# Altium PCB UV_Watch_1.PcbDoc (part 1 of 2)
Units mil, origin at the board's own origin, x right, y up, seen from the top; angles counter-clockwise.
Board outline 1500 x 1500 mil, 2 copper layers (Top Layer, Bottom Layer), stack 12.8 mil thick; 84 components, 41 nets, 258 pads, 64 vias.
Unrouted connection lines stored in the file: 1.
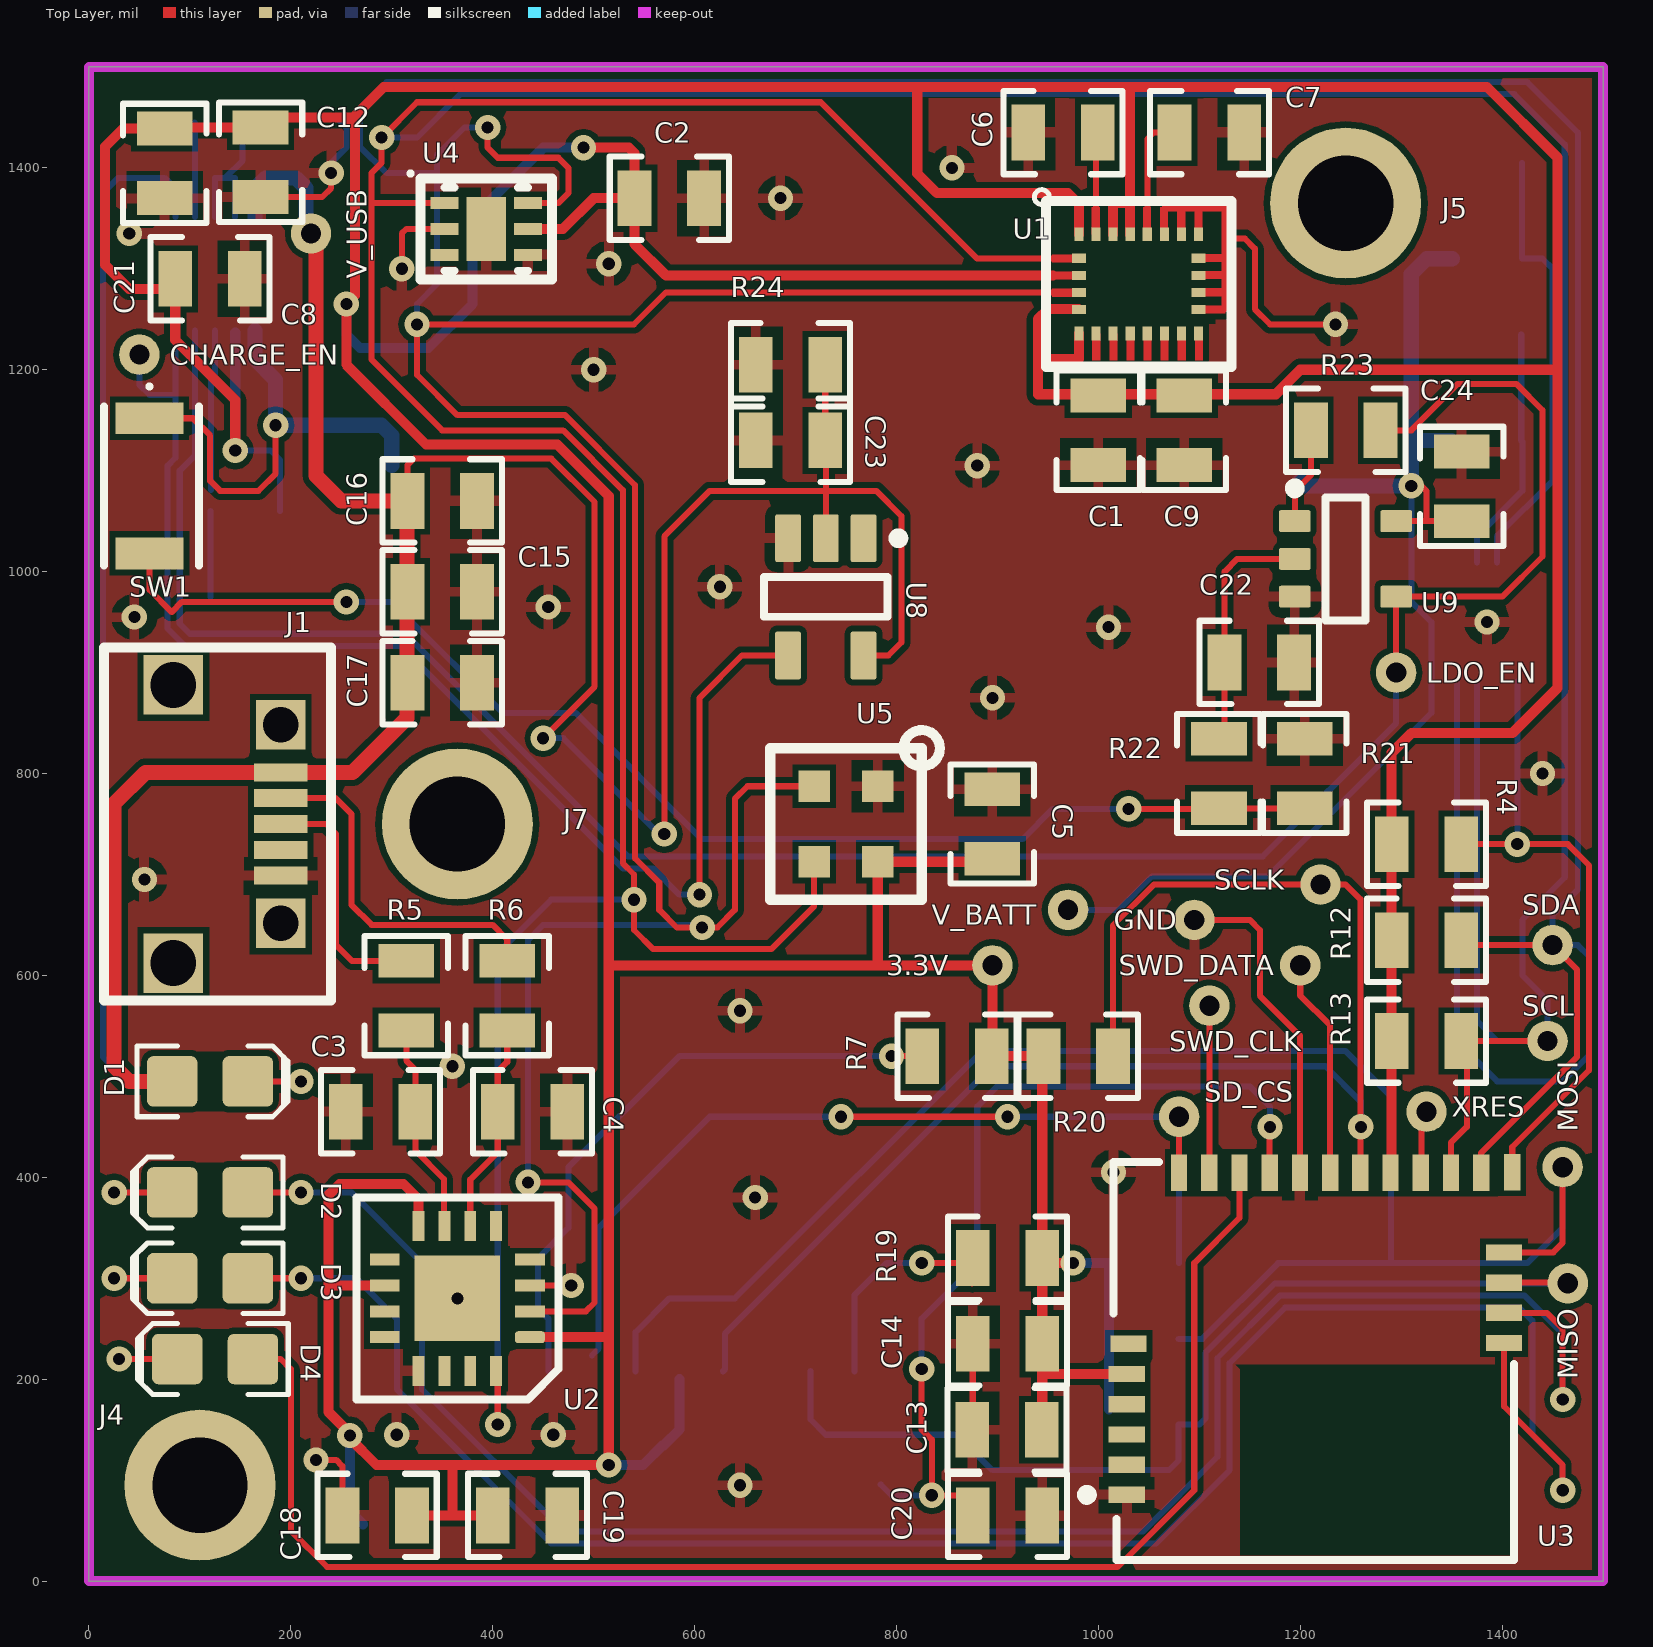
[diagram p0: Top Layer view]
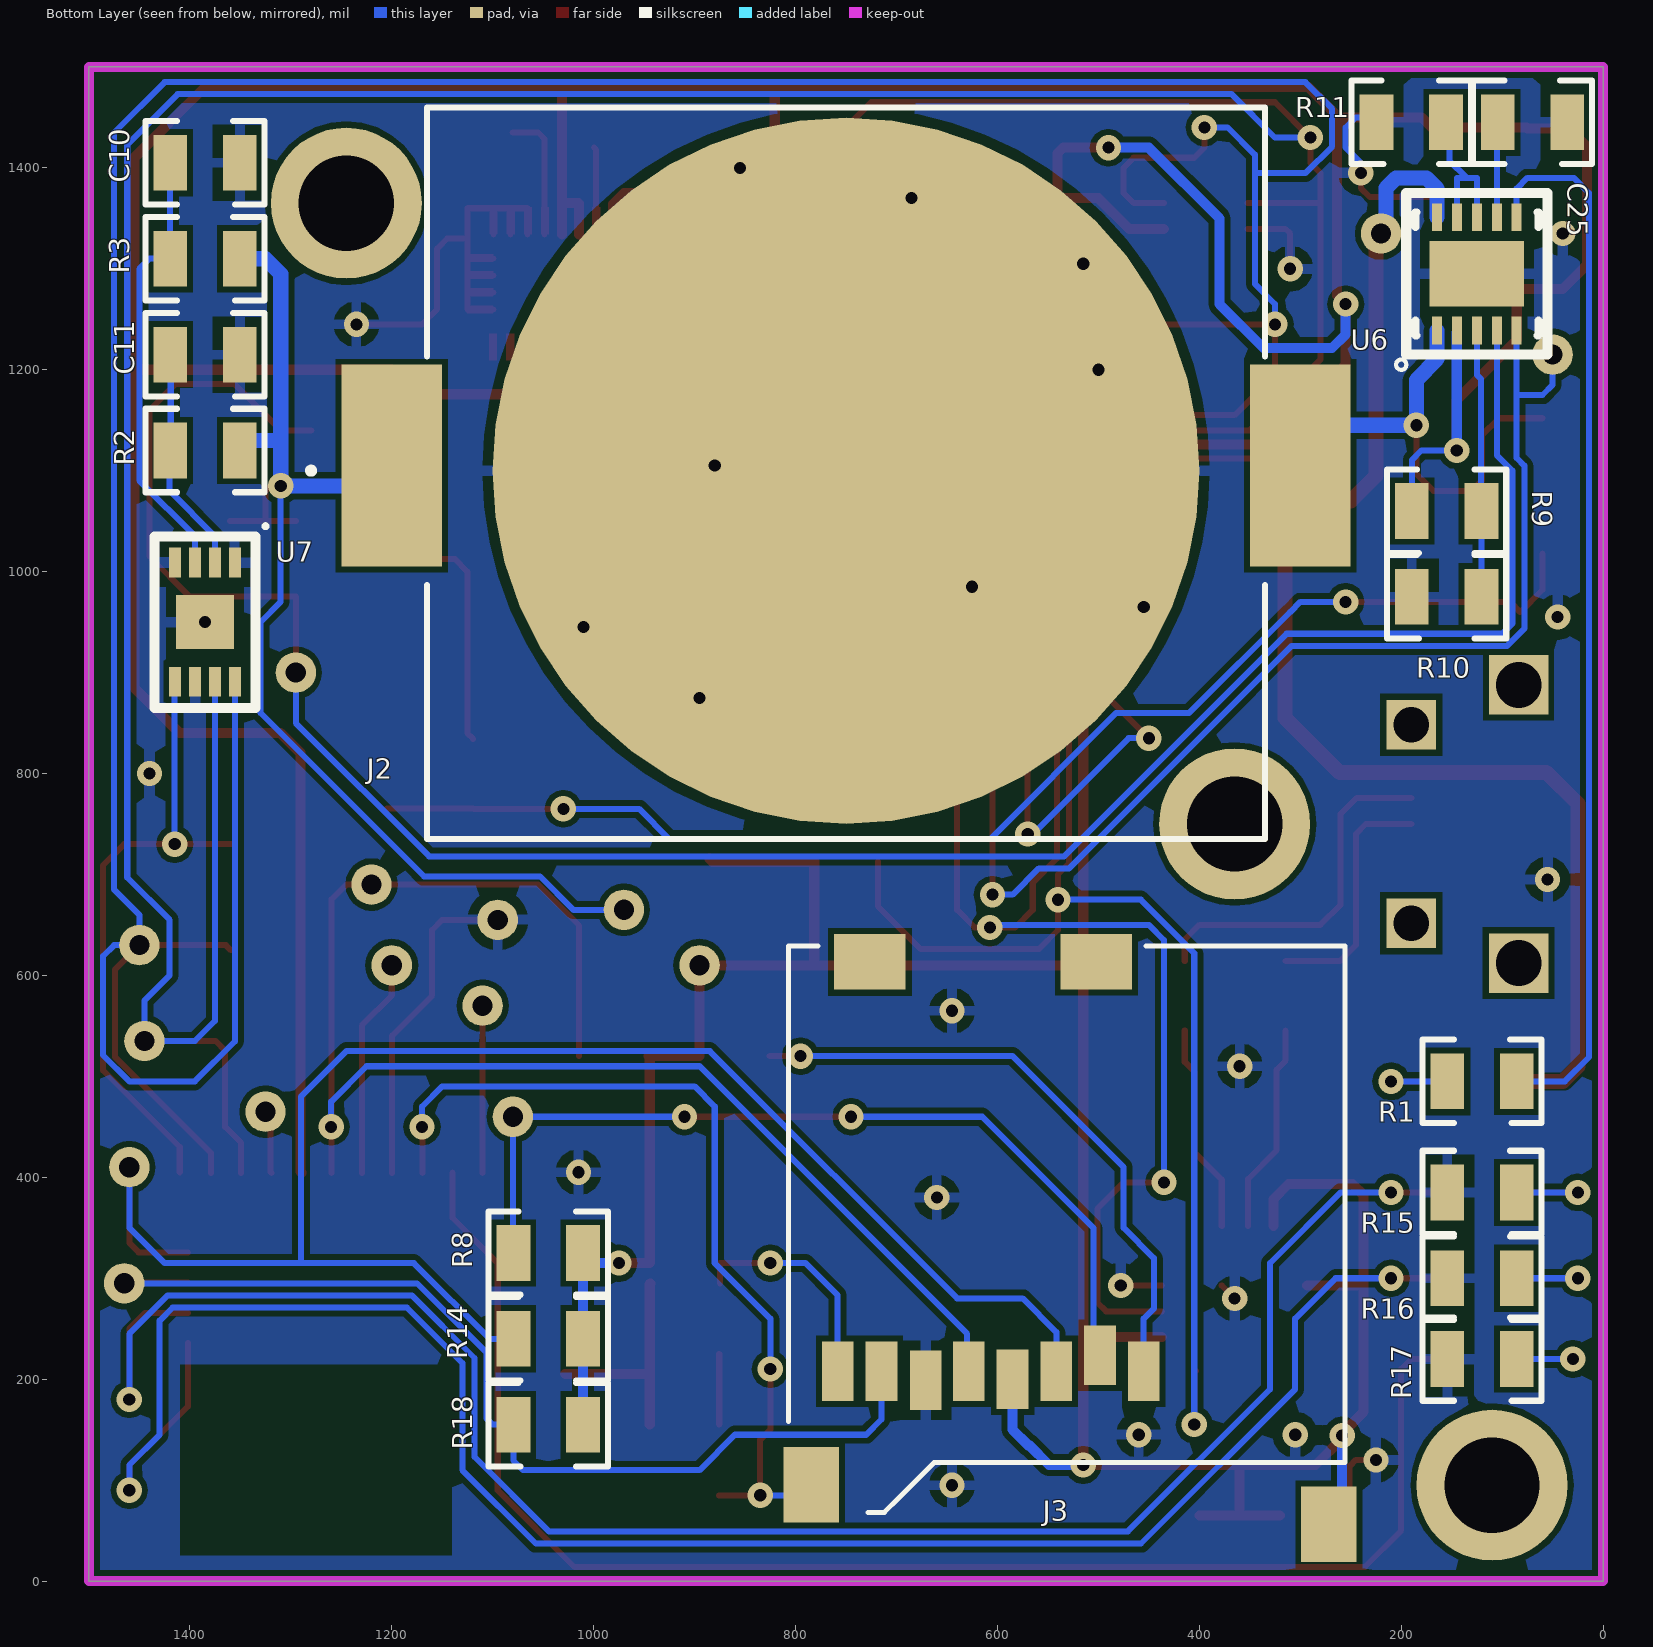
[diagram p1: Bottom Layer view, seen from below]
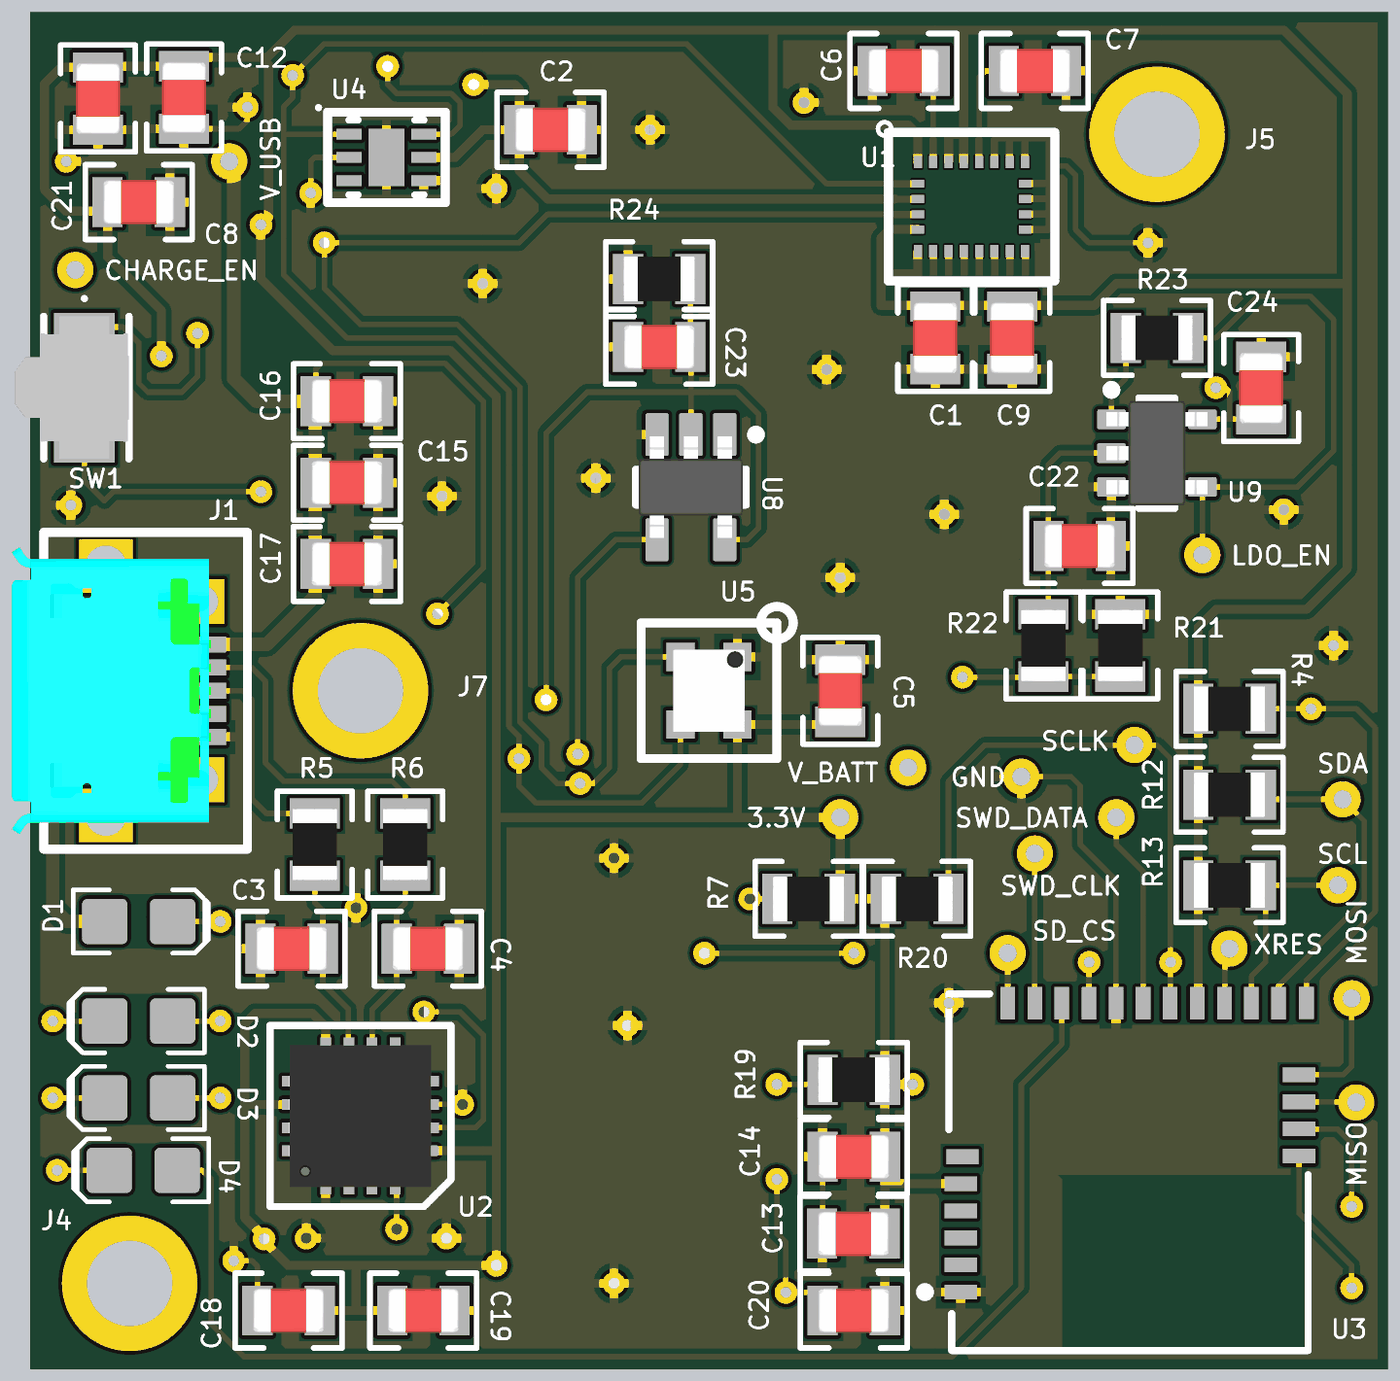
[diagram p2: 3D render of the assembled board from above, using the file's embedded part models]
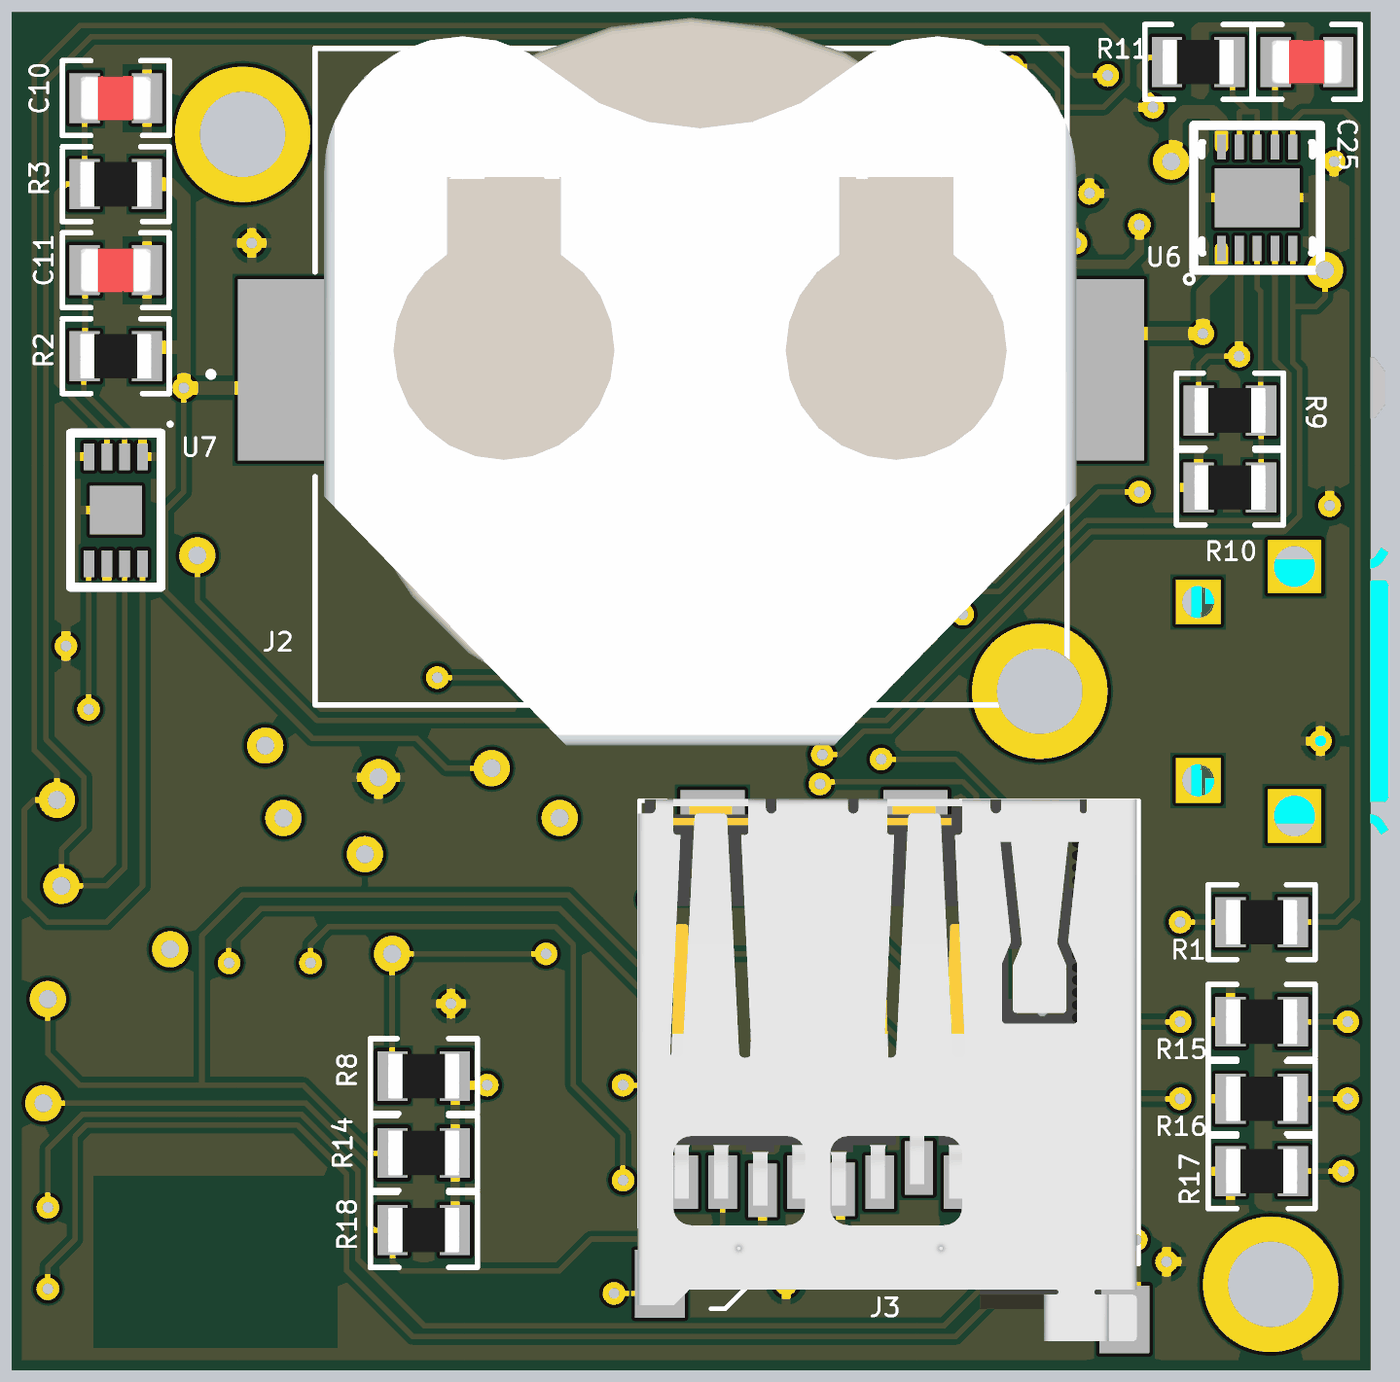
[diagram p3: 3D render of the assembled board from below, using the file's embedded part models]

## Layer stack, top to bottom
Top Solder: solder mask 0.4, Solder Resist, Dk 3.5
Top Layer: signal copper 1.4
Dielectric 1: core 10, FR-4, Dk 4.2
Bottom Layer: signal copper 1.4
Bottom Solder: solder mask 0.4, Solder Resist, Dk 3.5

## Board outline
0,0 1500,0 1500,1500 0,1500

## Design rules (kind name [scope] priority, off if disabled: settings)
Clearance [All] p1: gap=6 ignorepadtopadclearanceinfootprint=FALSE
MinimumSolderMaskSliver [All] p1: minsoldermaskwidth=6
PolygonConnect [All] p1: connectstyle=Relief reliefconductorwidth=10 reliefentries=4 polygonreliefangle="90 Angle" airgapwidth=10
RoutingVias [All] p1: holewidth=14 width=25 viastyle="Through Hole" minholewidth=12 minwidth=15 maxholewidth=28 maxwidth=50
SilkToSilkClearance [All] p1: silktosilkclearance=6
SilkToSolderMaskClearance [IsPad] p1: minsilkscreentomaskgap=6 clearancetoexposedcopper=TRUE
SolderMaskExpansion [All] p1: expansion=4
Width [All] p1: maxlimit=50 minlimit=6 preferedwidth=6
27 further rules are at their usual default settings.

## Components (designator, comment, footprint, x,y, rotation, side; value= is the part's Value field where it differs from the comment)
3.3V "Pogo-Pin Pad" Pogo-Pin-Hole 895,610 r90 top
C1 "10uF" CAP-0805(2012)-R 1000,1140 r270 top
C2 "1uF" CAP-0805(2012)-R 575,1370 r0 top
C3 "47pF" CAP-0805(2012)-R 288.9,465 r0 top
C4 "47pF" CAP-0805(2012)-R 439.45,465 r180 top
C5 "1uF" CAP-0805(2012)-R 895,750 r270 top
C6 "100nF" CAP-0805(2012)-R 965,1435 r180 top
C7 "10nF" CAP-0805(2012)-R 1110,1435 r0 top
C8 "1uF" CAP-0805(2012)-R 120,1290 r0 top
C9 "100nF" CAP-0805(2012)-R 1085,1140 r270 top
C10 "10nF" CAP-0805(2012)-R 1385,1405 r180 bottom
C11 "1uF" CAP-0805(2012)-R 1385,1215 r180 bottom
C12 "10uF" CAP-0805(2012)-R 170,1405.55 r270 top
C13 "10uF" CAP-0805(2012)-R 909.45,150 r180 top
C14 "100nF" CAP-0805(2012)-R 910,235 r180 top
C15 "1uF" CAP-0805(2012)-R 350,980 r0 top
C16 "10uF" CAP-0805(2012)-R 350,1070 r180 top
C17 "10uF" CAP-0805(2012)-R 350,890 r180 top
C18 "10uF" CAP-0805(2012)-R 285.55,65 r180 top
C19 "1uF" CAP-0805(2012)-R 434.45,65 r180 top
C20 "1uF" CAP-0805(2012)-R 910,65 r0 top
C21 "100nF" CAP-0805(2012)-R 75,1404.45 r90 top
C22 "100nF" CAP-0805(2012)-R 1159.45,910 r180 top
C23 "1uF" CAP-0805(2012)-R 695,1130 r0 top
C24 "1uF" CAP-0805(2012)-R 1360,1084.45 r90 top
C25 "68nF" CAP-0805(2012)-R 70,1445 r180 bottom
CHARGE_EN "Pogo-Pin Pad" Pogo-Pin-Hole 50,1215 r180 top
D1 "Green" LED-0805-A 120,495 r0 top
D2 "Orange" LED-0805-A 120,385 r180 top
D3 "Red" LED-0805-A 120,300 r180 top
D4 "Blue" LED-0805-A 125,220 r180 top
GND "Pogo-Pin Pad" Pogo-Pin-Hole 1095,655 r180 top
J1 "USB" USB_Connector_5P_MICRO_USB_FCI 190,750 r270 top
J2 "Header 2 pin" LINX_BATT_HLDR 750,1100 r180 bottom
J3 "693071010811" 693071010811 807.05,629.13 r0 bottom
J4 "M2/2-56 Mounting Hole" "MOUNTING HOLE" 110,95 r0 top
J5 "M2/2-56 Mounting Hole" "MOUNTING HOLE" 1245,1365 r0 top
J7 "M2/2-56 Mounting Hole" "Mounting Hole" 365,750 r0 top
LDO_EN "Pogo-Pin Pad" Pogo-Pin-Hole 1295,900 r180 top
MISO "Pogo-Pin Pad" Pogo-Pin-Hole 1465,295 r90 top
MOSI "Pogo-Pin Pad" Pogo-Pin-Hole 1460,410 r90 top
R1 "71.5R" R-0805(2012)-R 120,495 r180 bottom
R2 "1kR" R-0805(2012)-R 1385,1120 r180 bottom
R3 "150R" R-0805(2012)-R 1385,1310 r180 bottom
R4 "4.7kR" R-0805(2012)-R 1325,730 r0 top
R5 "27R" R-0805(2012)-R 314.45,580 r270 top
R6 "27R" R-0805(2012)-R 414.45,580 r270 top
R7 "100kR" R-0805(2012)-R 860,520 r180 top
R8 "4.7kR" R-0805(2012)-R 1045,325 r0 bottom
R9 "442kR" R-0805(2012)-R 155,1060 r0 bottom
R10 "160kR" R-0805(2012)-R 155,975 r0 bottom
R11 "25.5kR" R-0805(2012)-R 190,1445 r0 bottom
R12 "4.7kR" R-0805(2012)-R 1325,635 r180 top
R13 "4.7kR" R-0805(2012)-R 1325,535 r0 top
R14 "4.7kR" R-0805(2012)-R 1045,240 r0 bottom
R15 "80.6R" R-0805(2012)-R 120,385 r180 bottom
R16 "80.6R" R-0805(2012)-R 120,300 r180 bottom
R17 "100R" R-0805(2012)-R 120,220 r180 bottom
R18 "4.7kR" R-0805(2012)-R 1045,155 r0 bottom
R19 "100kR" R-0805(2012)-R 910,320 r180 top
R20 "4.7kR" R-0805(2012)-R 980,520 r0 top
R21 "100kR" R-0805(2012)-R 1204.45,800 r90 top
R22 "10kR" R-0805(2012)-R 1119.45,800 r90 top
R23 "10kR" R-0805(2012)-R 1245,1140 r0 top
R24 "100kR" R-0805(2012)-R 695,1205 r180 top
SCL "Pogo-Pin Pad" Pogo-Pin-Hole 1445,535 r90 top
SCLK "Pogo-Pin Pad" Pogo-Pin-Hole 1220,690 r90 top
SD_CS "Pogo-Pin Pad" Pogo-Pin-Hole 1080,460 r90 top
SDA "Pogo-Pin Pad" Pogo-Pin-Hole 1450,630 r90 top
SW1 "SW-SPST-2_C" OMRON-B3U-3000P_V 60,1085 r270 top
SWD_CLK "Pogo-Pin Pad" Pogo-Pin-Hole 1110,570 r180 top
SWD_DATA "Pogo-Pin Pad" Pogo-Pin-Hole 1200,610 r90 top
U1 "LSM9DS1" STM-LGA-24 1040,1285 r0 top
U2 "FT201XQ-R" QFN-16 365,280 r180 top
U3 "CYBLE-222014-01" CYP-SP21_V 1215,245 r180 top
U4 "TMP116" WSON-6 393.66,1339.41 r0 top
U5 "GUVB-C31SM" GUVB-C31SM 750,750 r0 top
U6 "LTC4063" LT-DD-10_V 125,1295 r90 bottom
U7 "MAX17043G" TDFN-MN8 1385,950 r270 bottom
U8 "TI-SN74XXX1XX4-XX-5" DBV0005A_M 730,975 r270 top
U9 "TI-SN74XXX1G80-5" DBV0005A_L 1244.8,1012.6 r0 top
V_BATT "Pogo-Pin Pad" Pogo-Pin-Hole 970,665 r180 top
V_USB "Pogo-Pin Pad" Pogo-Pin-Hole 220,1335 r90 top
XRES "Pogo-Pin Pad" Pogo-Pin-Hole 1325,465 r90 top

## Footprints (in the part's own frame and the unit in brackets; to place one, negate y for a bottom-side part, rotate by r counter-clockwise, add the part's x,y. Pads: shape width x height; smd on the part's side, far side on the other; paste and mask are expansions set on the pad)
693071010811 [mm] "Wurth CONN MICRO SD CARD PUSH-PUSH R/A"
  rect 0.8x1.5 smd: 1(-8.94,10.7) 2(-7.84,10.3) 3(-6.74,10.7) 4(-5.64,10.9) 5(-4.54,10.7) 6(-3.454,10.929) 7(-2.34,10.7) 8(-1.24,10.7)
  rect 1.4x1.9 smd: 9(-0.575,13.55) 10(-13.6,14.55)
  rect 1.8x1.4 smd: 11(-2.05,0.4) 12(-7.75,0.4)
  silkscreen extent -14,0 0,14.25, body extent -13.95,-0.04 0.05,15.16, height 1.84
CAP-0805(2012)-R [mm] "Capacitor 0805(2012) Reflow"
  rect 0.85x1.4 smd: 1(-0.875,0) 2(0.875,0)
  silkscreen extent -1.5,-1.05 1.5,1.05, body extent -1,-0.63 1,0.63, height 0.78
CYP-SP21_V [mm] "Module, 2-Leads, Body 10x10mm"
  rect 0.91x0.41 smd: 1(4.745,4.053) 2(4.745,3.293) 3(4.745,2.533) 4(4.745,1.773) 5(4.745,1.013) 6(4.699,0.254) 19(-4.745,-2.047) 20(-4.745,-1.288) 21(-4.745,-0.527) 22(-4.745,0.235)
  rect 0.41x0.91 smd: 7(3.43,-4.052) 8(2.67,-4.052) 9(1.91,-4.052) 10(1.15,-4.052) 11(0.39,-4.052) 12(-0.37,-4.052) 13(-1.13,-4.052) 14(-1.89,-4.052) 15(-2.65,-4.052) 16(-3.41,-4.052) 17(-4.17,-4.052) 18(-4.953,-4.064)
  Top Layer pour cut-out: -4.953,5.588 -4.953,0.762 2.032,0.762 1.905,0.889 1.905,5.588
  Bottom Layer pour cut-out: -4.953,5.588 -4.953,0.762 1.905,0.762 1.905,5.588
  silkscreen extent -5,-4.32 5.87,5.69, body extent -5,-4.31 5,5.69, height 1.8
DBV0005A_L [mm] "SOT23, 5-Leads, Body 3.05x1.75mm, Pitch 0.95mm, IPC High Density"
  rrect18% 0.8x0.55 smd: 1(-1.275,0.95) 2(-1.275,0) 3(-1.275,-0.95) 4(1.275,-0.95) 5(1.275,0.95)
  silkscreen extent -1.4,-1.55 0.5,1.9, body extent -1.42,-1.46 1.42,1.46, height 1.08
DBV0005A_M [mm] "SOT23, 5-Leads, Body 3.05x1.75mm, Pitch 0.95mm, IPC Low Density"
  rrect15% 1.2x0.65 smd: 1(-1.475,0.95) 2(-1.475,0) 3(-1.475,-0.95) 4(1.475,-0.95) 5(1.475,0.95)
  silkscreen extent -1.6,-1.55 0.5,1.95, body extent -1.42,-1.46 1.42,1.46, height 1.08
GUVB-C31SM [mm]
  rect 0.8x0.8 smd: 1(0.8,0.95) 2(-0.8,0.95) 3(-0.8,-0.95) 4(0.8,-0.95)
  silkscreen extent -1.91,-1.91 2.36,2.36, body extent -1,-1.15 1,1.15, height 1.4
LED-0805-A [mil]
  round 20 on Mech14: 0(0,0)
  rrect25% 50x50 smd: A(-37.5,0) K(37.5,0)
  Top Layer pour cut-out: -15,30 15,30 15,-30 -15,-30
  silkscreen extent -72,-35 77,35, body extent -39,-25 39,25, height 31
LINX_BATT_HLDR [mil]
  rect 100x200 smd: 1(-450,5) 1(450,5)
  round 700 smd: 2(0,0)
  silkscreen extent -533,-365 415,360, body extent -405,-410 425,394, height 150
LT-DD-10_V [mm] "SON, 10-Leads, Body 3x3mm, Pitch 0.5mm, Thermal Pad 2.38x1.65mm"
  rect 0.7x0.25 smd mask+0.102: 1(-1.425,1) 2(-1.425,0.5) 3(-1.425,0) 4(-1.425,-0.5) 5(-1.425,-1) 6(1.425,-1) 7(1.425,-0.5) 8(1.425,0) 9(1.425,0.5) 10(1.425,1)
  rect 1.65x2.38 smd mask+0.102: 11(0,0)
  silkscreen extent -2.42,-1.78 2.03,2.04, body extent -1.5,-1.5 1.5,1.5, height 0.8
"MOUNTING HOLE" [mm] "M2 or 2-56 Mounting Hole"
  round 3.8 hole 2.4: 11(0,0)
"Mounting Hole" [mm] "M2 or 2-56 Mounting Hole"
  round 3.8 hole 2.4: 11(0,0)
OMRON-B3U-3000P_V [mm] "SMD, 2-Leads, Body 4x3.2mm"
  rect 0.8x1.7 smd: 1(-1.7,0) 2(1.7,0)
  silkscreen extent -2.55,-1.14 2,1.25, body extent -2,-1.95 2,1.25, height 1.2
Pogo-Pin-Hole [mil]
  round 40 hole 20: 1(0,0)
QFN-16 [mm]
  rrect50% 0.75x0.3 smd: 1(-1.825,0.975)
  rect 0.75x0.3 smd: 2(-1.825,0.325) 3(-1.825,-0.325) 4(-1.825,-0.975) 9(1.825,-0.975) 10(1.825,-0.325) 11(1.825,0.325) 12(1.825,0.975)
  rect 0.3x0.75 smd: 5(-0.975,-1.825) 6(-0.325,-1.825) 7(0.325,-1.825) 8(0.975,-1.825) 13(0.975,1.825) 14(0.325,1.825) 15(-0.325,1.825) 16(-0.975,1.825)
  rect 2.15x2.15 smd: 17(0,0)
  silkscreen extent -2.54,-2.54 2.54,2.54, body extent -2,-2 2,2, height 0.92
R-0805(2012)-R [mm] "Resistor 0805(2012) Reflow"
  rect 0.85x1.4 smd: 1(-0.875,0) 2(0.875,0)
  silkscreen extent -1.5,-1.05 1.5,1.05, body extent -1,-0.62 1,0.63, height 0.5
STM-LGA-24 [mm] "LGA, 24-Leads, Body 3.65x3.15mm, Pitch 0.43mm"
  rect 0.23x0.35 smd mask+0.05: 1(-1.505,1.25) 6(-1.505,-1.25) 7(-1.075,-1.25) 8(-0.645,-1.25) 9(-0.215,-1.25) 10(0.215,-1.25) 11(0.645,-1.25) 12(1.075,-1.25) 13(1.505,-1.25) 18(1.505,1.25) 19(1.075,1.25) 20(0.645,1.25) 21(0.215,1.25) 22(-0.215,1.25) 23(-0.645,1.25) 24(-1.075,1.25)
  rect 0.35x0.23 smd mask+0.05: 2(-1.505,0.645) 3(-1.505,0.215) 4(-1.505,-0.215) 5(-1.505,-0.645) 14(1.505,-0.645) 15(1.505,-0.215) 16(1.505,0.215) 17(1.505,0.645)
  Top Layer region: -2.185,-0.55 -2.185,-0.753 -1.505,-0.753 -1.505,-0.55
  Top Layer region: -2.185,-0.12 -2.185,-0.323 -1.505,-0.323 -1.505,-0.12
  Top Layer region: -2.185,0.31 -2.185,0.107 -1.505,0.107 -1.505,0.31
  Top Layer region: -2.185,0.74 -2.185,0.537 -1.505,0.537 -1.505,0.74
  Top Layer region: -1.41,1.93 -1.613,1.93 -1.613,1.25 -1.41,1.25
  Top Layer region: -0.98,1.93 -1.183,1.93 -1.183,1.25 -0.98,1.25
  Top Layer region: -0.55,1.93 -0.753,1.93 -0.753,1.25 -0.55,1.25
  Top Layer region: -0.12,1.93 -0.323,1.93 -0.323,1.25 -0.12,1.25
  Top Layer region: 0.31,1.93 0.107,1.93 0.107,1.25 0.31,1.25
  Top Layer region: 0.74,1.93 0.537,1.93 0.537,1.25 0.74,1.25
  Top Layer region: 1.17,1.93 0.967,1.93 0.967,1.25 1.17,1.25
  Top Layer region: 1.6,1.93 1.397,1.93 1.397,1.25 1.6,1.25
  Top Layer region: 2.185,0.55 2.185,0.753 1.505,0.753 1.505,0.55
  Top Layer region: 2.185,0.12 2.185,0.323 1.505,0.323 1.505,0.12
  Top Layer region: 2.185,-0.31 2.185,-0.107 1.505,-0.107 1.505,-0.31
  Top Layer region: 2.185,-0.74 2.185,-0.537 1.505,-0.537 1.505,-0.74
  Top Layer region: 1.41,-1.93 1.613,-1.93 1.613,-1.25 1.41,-1.25
  Top Layer region: 0.98,-1.93 1.183,-1.93 1.183,-1.25 0.98,-1.25
  Top Layer region: 0.55,-1.93 0.753,-1.93 0.753,-1.25 0.55,-1.25
  Top Layer region: 0.12,-1.93 0.323,-1.93 0.323,-1.25 0.12,-1.25
  Top Layer region: -0.31,-1.93 -0.107,-1.93 -0.107,-1.25 -0.31,-1.25
  Top Layer region: -0.74,-1.93 -0.537,-1.93 -0.537,-1.25 -0.74,-1.25
  Top Layer region: -1.6,-1.93 -1.397,-1.93 -1.397,-1.25 -1.6,-1.25
  Top Layer region: -1.17,-1.93 -0.967,-1.93 -0.967,-1.25 -1.17,-1.25
  Top Layer pour cut-out: -1.016,0.762 1.016,0.762 1.016,-0.762 -1.016,-0.762
  silkscreen extent -2.62,-2.08 2.34,2.37, body extent -1.82,-1.57 1.83,1.58, height 1.03
TDFN-MN8 [mm] "SON, 8-Leads, Body 2x3mm, Pitch 0.5mm, Microchip Recommended"
  rect 0.75x0.3 smd: 1(-1.5,0.75) 2(-1.5,0.25) 3(-1.5,-0.25) 4(-1.5,-0.75) 5(1.5,-0.75) 6(1.5,-0.25) 7(1.5,0.25) 8(1.5,0.75)
  rect 1.36x1.46 smd: 9(0,0)
  silkscreen extent -2.46,-1.27 2.16,1.57, body extent -1.52,-1.02 1.52,1.02, height 0.8
USB_Connector_5P_MICRO_USB_FCI [mm] "USB_Connector_5P_MICRO_USB_FCI_TypeB"
  rect 0.45x1.35 smd: 1(-1.3,0) 2(-0.65,0) 3(0,0) 4(0.65,0) 5(1.3,0)
  rect 1.25x1.25 hole 0.9: 15(2.5,0) 16(-2.5,0)
  rect 1.5x1.5 hole 1.15: 18(-3.5,-2.7) 18(3.5,-2.7)
  silkscreen extent -4.44,-4.45 4.45,1.27, body extent -4.02,-5.33 4.02,0.25, height 2.73
WSON-6 [mm] "SON, 6-Leads, Body 2x2mm, Pitch 0.65mm, Thermal Pad 1X1.6mm"
  rect 0.7x0.3 smd: 1(-1.05,0.65) 2(-1.05,0) 3(-1.05,-0.65) 4(1.05,-0.65) 5(1.05,0) 6(1.05,0.65)
  rect 1x1.6 smd: 7(0,0)
  silkscreen extent -1.95,-1.27 1.65,1.45, body extent -1,-1 1,1, height 0.8

## Part data
3.3V CHARGE_EN GND LDO_EN MISO MOSI SCL SCLK SD_CS SDA SWD_CLK SWD_DATA V_BATT V_USB XRES: Contact Resistance=30mR, Current Rating=3A, Manufacturer=Harwin, Manufacturer Part Number=P13-2123, Max Operating Temperature=85°C, Min Operating Temperature=-40°C, Package Quantity=500, Resistance=0.03R, Supplier Part Number 1=855-P13-2123, Body Material=Bronze, Body Plating=Gold, ComponentLink1Description=https://datasheet.ciiva.com/1454/1498711-1454531.pdf, ComponentLink1URL=https://datasheet.ciiva.com/1454/1498711-1454531.pdf, ComponentLink2Description=https://datasheet.ciiva.com/5229/p13-xx23-351008-5229722.pdf, ComponentLink2URL=https://datasheet.ciiva.com/5229/p13-xx23-351008-5229722.pdf, Contact Material=Copper, Depth=1mm, Description 1="HARWIN         P13-2123             PROBE, CONVEX, 1.27MM PITCH", Gender=Male, Length=0.652inch, Material=Bronze, Mating Cycles=1000000, Pricing 1="1=3.36, 10=3.22, 50=2.82, 100=2.69, 1000=1.95, 10000=1.82 (USD)", Radiation Hardening=No, REACH SVHC="No SVHC", Stock 1=1373, Supplier 1=Mouser
C1 C12 C13 C16 C17 C18: library part C-0805(2012), "___ OHM ___ mW 0805(2012) SMD", Case/Package=0805, Case Code (Metric)=2012, Dielectric=Y5V, Manufacturer=Yageo, Manufacturer Part Number=CC0805ZKY5V5BB106, Max Operating Temperature=85°C, Min Operating Temperature=-30°C, Package Quantity=1, Supplier Part Number 1=603-CC805ZKY5V5BB106, Tolerance=80%, Voltage Rating=6.3V, Capacitance=10uF, Case Code (Imperial)=0805, ComponentLink1Description=https://datasheet.ciiva.com/180/mlccorderingcode-180353.pdf, ComponentLink1URL=https://datasheet.ciiva.com/180/mlccorderingcode-180353.pdf, ComponentLink2Description=https://datasheet.ciiva.com/180/mlccorderingcode-180354.pdf, ComponentLink2URL=https://datasheet.ciiva.com/180/mlccorderingcode-180354.pdf, ComponentLink3Description=https://datasheet.ciiva.com/180/mlccorderingcode-180355.pdf, ComponentLink3URL=https://datasheet.ciiva.com/180/mlccorderingcode-180355.pdf, ComponentLink4Description=https://datasheet.ciiva.com/11465/upy-gphc-y5v-6-3v-to-50v-5-11465830.pdf, ComponentLink4URL=https://datasheet.ciiva.com/11465/upy-gphc-y5v-6-3v-to-50v-5-11465830.pdf, ComponentLink5Description=https://datasheet.ciiva.com/17436/upy-gphc-y5v-6-3v-to-50v-5-17436535.pdf, ComponentLink5URL=https://datasheet.ciiva.com/17436/upy-gphc-y5v-6-3v-to-50v-5-17436535.pdf, ComponentLink6Description=https://datasheet.ciiva.com/13211/upy-gp-np0-16v-to-50v-8-13211102.pdf, ComponentLink6URL=https://datasheet.ciiva.com/13211/upy-gp-np0-16v-to-50v-8-13211102.pdf, Composition=Ceramic, Depth=1.25mm, Description 1="CAP CER 10UF 6.3V Y5V 0805", Halogen Free="Halogen Free", Height=1.25mm, Lead Free="Lead Free", Length=2mm, Mount="Surface Mount", Number of Pins=2, Packaging="Tape and Reel", Pricing 1="1=0.15, 10=0.076, 50=0.076, 100=0.033, 1000=0.027, 10000=0.023 (USD)", Radiation Hardening=No, Stock 1=8650, Supplier 1=Mouser, Thickness=0.057inch, Voltage Rating (DC)=6.3V, Width=0.049inch
C2 C5 C8 C11 C15 C19 C20 C23 C24: library part C-0805(2012), "___ OHM ___ mW 0805(2012) SMD", Case/Package=0805, Case Code (Metric)=2012, Dielectric=X7R, Manufacturer=Yageo, Manufacturer Part Number=CC0805KKX7R5BB105, Max Operating Temperature=125°C, Min Operating Temperature=-55°C, Supplier Part Number 1=603-CC805KKX7R5BB105, Tolerance=10%, Voltage Rating=6.3V, Capacitance=1uF, Case Code (Imperial)=0805, ComponentLink1Description=https://datasheet.ciiva.com/13207/upy-gp-np0-16v-to-50v-8-13207753.pdf, ComponentLink1URL=https://datasheet.ciiva.com/13207/upy-gp-np0-16v-to-50v-8-13207753.pdf, Composition=Ceramic, Depth=1.25mm, Description 1="Cap Ceramic 1uF 6.3V X7R 10% SMD 0805 125C Blister T/R", Halogen Free="Halogen Free", Height=1.25mm, Lead Free="Lead Free", Length=2mm, Mount="Surface Mount", Packaging="Tape and Reel", Radiation Hardening=No, Stock 1=7735, Supplier 1=Mouser, Termination=SMD/SMT, Thickness=0.057inch, Voltage Rating (DC)=6.3V, Weight=0.000194oz, Width=0.049inch
  C2 C5 C8 C11 C15 C19 C20: Pricing 1="1=0.14, 10=0.075, 50=0.075, 100=0.034, 1000=0.028, 10000=0.019 (USD)"
  C23 C24: Pricing 1="1=0.14, 10=0.075, 50=0.075, 100=0.034, 1000=0.028, 10000=0.02 (USD)"
C3 C4: library part C-0805(2012), "___ OHM ___ mW 0805(2012) SMD", Case/Package=0805, Case Code (Metric)=2012, Dielectric=C0G, Dielectric Material=Tantalum, Manufacturer="Vishay Vitramon", Manufacturer Part Number=VJ0805A470GXQPW1BC, Max Operating Temperature=125°C, Min Operating Temperature=-55°C, Package Quantity=15000, Supplier Part Number 1=77-VJ0805A470GXQPBC, Tolerance=2%, Voltage Rating (DC)=10V, Capacitance=47pF, Case Code (Imperial)=0805, ComponentLink1Description=https://datasheet.ciiva.com/11480/vjw1bcbascomseries-11480789.pdf, ComponentLink1URL=https://datasheet.ciiva.com/11480/vjw1bcbascomseries-11480789.pdf, Depth=1.25mm, Description 1="Multilayer Ceramic Capacitors MLCC - SMD/SMT 0805 47pF 10volts C0G 2%", Height=1.45mm, Lead Free="Lead Free", Length=2mm, Mount="Surface Mount", Packaging="Tape and Reel", Pricing 1="1=0.13, 10=0.13, 50=0.06, 100=0.044, 1000=0.026, 10000=0.026 (USD)", Stock 1=31864, Supplier 1=Mouser, Termination=SMD/SMT, Weight=0.000194oz, Width=1.25mm
C6 C9 C14 C21 C22: library part C-0805(2012), "___ OHM ___ mW 0805(2012) SMD", Case/Package=0805, Case Code (Metric)=2012, Manufacturer="Wurth Electronics", Manufacturer Part Number=885012207016, Max Operating Temperature=125°C, Min Operating Temperature=-55°C, Supplier Part Number 1=710-885012207016, Tolerance=10%, Voltage Rating=10V, Capacitance=100nF, Case Code (Imperial)=0805, Description 1="0.10µF 10V Ceramic Capacitor X7R 0805 (2012 Metric) 0.079\" L x 0.049\" W (2.00mm x 1.25mm)", Length=0.079inch, Mount="Surface Mount", Packaging="Cut Tape", Pricing 1="1=0.08, 10=0.07, 50=0.05, 100=0.05, 1000=0.025, 10000=0.021 (USD)", Stock 1=8228, Supplier 1=Mouser, Thickness=0.035inch, Width=0.049inch
C7 C10: library part C-0805(2012), "___ OHM ___ mW 0805(2012) SMD", Case/Package=0805, Case Code (Metric)=2012, Dielectric=X7R, Dielectric Material=Tantalum, Manufacturer="Vishay Vitramon", Manufacturer Part Number=VJ0805Y103MXQPW1BC, Max Operating Temperature=125°C, Min Operating Temperature=-55°C, Package Quantity=15000, Supplier Part Number 1=77-VJ0805Y103MXQPBC, Tolerance=20%, Voltage Rating (DC)=10V, Capacitance=10nF, Case Code (Imperial)=0805, ComponentLink1Description=https://datasheet.ciiva.com/11497/vjw1bcbascomseries-11497433.pdf, ComponentLink1URL=https://datasheet.ciiva.com/11497/vjw1bcbascomseries-11497433.pdf, Depth=1.25mm, Description 1="Multilayer Ceramic Capacitors MLCC - SMD/SMT 0805 0.01uF 10volts X7R 20%", Height=1.45mm, Lead Free="Lead Free", Length=2mm, Mount="Surface Mount", Packaging="Tape and Reel", Pricing 1="1=0.1, 10=0.1, 50=0.07, 100=0.058, 1000=0.022, 10000=0.022 (USD)", Stock 1=23611, Supplier 1=Mouser, Termination=SMD/SMT, Width=1.25mm
C25: library part C-0805(2012), "___ OHM ___ mW 0805(2012) SMD", Case/Package=0805, Case Code (Metric)=2012, Manufacturer="Wurth Electronics", Manufacturer Part Number=885012207044, Max Operating Temperature=125°C, Min Operating Temperature=-55°C, Supplier Part Number 1=710-885012207044, Tolerance=10%, Voltage Rating=16V, Capacitance=68nF, Case Code (Imperial)=0805, Description 1="0.068µF 16V Ceramic Capacitor X7R 0805 (2012 Metric) 0.079\" L x 0.049\" W (2.00mm x 1.25mm)", Length=0.079inch, Mount="Surface Mount", Packaging="Tape and Reel", Pricing 1="1=0.08, 10=0.07, 50=0.05, 100=0.05, 1000=0.025, 10000=0.021 (USD)", Stock 1=3945, Supplier 1=Mouser, Thickness=0.035inch, Width=0.049inch
D1: library part LED_0805, "LED, 0805 SMD", Case/Package=0805, Case Code (Metric)=2012, Forward Current=20mA, Forward Voltage=2.1V, Lens Colour=Clear, Manufacturer=Kingbright, Manufacturer Part Number=APHCM2012CGCK-F01, Max Operating Temperature=85°C, Min Operating Temperature=-40°C, Package Quantity=1, Supplier Part Number 1=604-APHCM2012CGCK, Case Code (Imperial)=0805, Colour=Green, ComponentLink1Description=https://datasheet.ciiva.com/12403/aphcm2012cgck-f01-34366-12403909.pdf, ComponentLink1URL=https://datasheet.ciiva.com/12403/aphcm2012cgck-f01-34366-12403909.pdf, ComponentLink2Description=https://datasheet.ciiva.com/2113/aphcm2012cgck-f01-2113927.pdf, ComponentLink2URL=https://datasheet.ciiva.com/2113/aphcm2012cgck-f01-2113927.pdf, ComponentLink3Description=https://datasheet.ciiva.com/2113/aphcm2012cgck-f01-2113928.pdf, ComponentLink3URL=https://datasheet.ciiva.com/2113/aphcm2012cgck-f01-2113928.pdf, ComponentLink4Description=https://datasheet.ciiva.com/2113/aphcm2012cgck-f01-2113929.pdf, ComponentLink4URL=https://datasheet.ciiva.com/2113/aphcm2012cgck-f01-2113929.pdf, ComponentLink5Description=https://datasheet.ciiva.com/16494/aphcm2012cgck-f01-16494095.pdf, ComponentLink5URL=https://datasheet.ciiva.com/16494/aphcm2012cgck-f01-16494095.pdf, Description 1="LED 2X1.25MM LOPRO 570NM GRN SMD", Dominant Wavelength=570nm, Height=0.4mm, Illumination Colour=Green, Lead Free="Lead Free", Length=2mm, Lens Style=Flat,Clear, Luminous Intensity=40mcd, Mount="Surface Mount", Number of LEDs=1, Number of Pins=2, Packaging="Tape and Reel", Pricing 1="1=0.2, 10=0.121, 50=0.121, 100=0.09, 1000=0.083, 10000=0.062 (USD)", Stock 1=20488, Supplier 1=Mouser, Test Current=20mA, Viewing Angle=110°, Wavelength=570nm, Width=1.25mm
D2: library part LED_0805, "LED, 0805 SMD", Case/Package=0805, Case Code (Metric)=2012, Forward Voltage=1.8V, Lens Colour=Colorless, Manufacturer=Kingbright, Manufacturer Part Number=APT2012LSECK/J4-PRV, Supplier Part Number 1=604-APT2012LSECKJ4RV, Test Current=2mA, Case Code (Imperial)=0805, Colour=Orange, ComponentLink1Description=http://www.kingbrightusa.com/images/catalog/SPEC/APT2012LSECK-J4-PRV.pdf, ComponentLink1URL=http://www.kingbrightusa.com/images/catalog/SPEC/APT2012LSECK-J4-PRV.pdf, ComponentLink2Description=http://www.mouser.com/ds/2/216/APT2012LSECK-J4-PRV-535760.pdf, ComponentLink2URL=http://www.mouser.com/ds/2/216/APT2012LSECK-J4-PRV-535760.pdf, Description 1="Orange 605nm LED Indication - Discrete 1.8V 0805 (2012 Metric)", Dominant Wavelength=605nm, Height=0.75mm, Length=2mm, Lens Transparency=Clear, Luminous Intensity=50mcd, Mount="Surface Mount", Packaging="Tape and Reel", Pricing 1="1=0.49, 10=0.304, 50=0.304, 100=0.226, 1000=0.176, 10000=0.137 (USD)", Stock 1=9142, Supplier 1=Mouser, Viewing Angle=120°, Width=1.25mm
D3: library part LED_0805, "LED, 0805 SMD", Case/Package=0805, Case Code (Metric)=2012, Forward Voltage=1.8V, Lens Colour=Colorless, Manufacturer=Kingbright, Manufacturer Part Number=APT2012LSECK/J3-PRV, Supplier Part Number 1=604-APT2012LSECKJ3RV, Test Current=2mA, Case Code (Imperial)=0805, Colour=Red, ComponentLink1Description=http://www.mouser.com/ds/2/216/APT2012LSECK-J3-PRV-535674.pdf, ComponentLink1URL=http://www.mouser.com/ds/2/216/APT2012LSECK-J3-PRV-535674.pdf, ComponentLink2Description=http://www.kingbrightusa.com/images/catalog/SPEC/APT2012LSECK-J3-PRV.pdf, ComponentLink2URL=http://www.kingbrightusa.com/images/catalog/SPEC/APT2012LSECK-J3-PRV.pdf, Description 1="Red 625nm LED Indication - Discrete 1.8V 0805 (2012 Metric)", Dominant Wavelength=625nm, Height=0.75mm, Length=2mm, Lens Transparency=Clear, Luminous Intensity=40mcd, Mount="Surface Mount", Packaging="Tape and Reel", Pricing 1="1=0.49, 10=0.305, 50=0.305, 100=0.226, 1000=0.177, 10000=0.138 (USD)", Stock 1=7340, Supplier 1=Mouser, Viewing Angle=120°, Width=1.25mm
D4: library part LED_0805, "LED, 0805 SMD", Case/Package=0805, Case Code (Metric)=2012, Forward Voltage=2.65V, Lens Colour=Colorless, Manufacturer=Kingbright, Manufacturer Part Number=APTD2012LQBC/D, Supplier Part Number 1=604-APTD2012LQBCD, Test Current=2mA, Case Code (Imperial)=0805, Colour=Blue, ComponentLink1Description=http://www.mouser.com/ds/2/216/APT2012LVBC-D-535767.pdf, ComponentLink1URL=http://www.mouser.com/ds/2/216/APT2012LVBC-D-535767.pdf, ComponentLink2Description=http://www.kingbrightusa.com/images/catalog/SPEC/APT2012LVBC-D.pdf, ComponentLink2URL=http://www.kingbrightusa.com/images/catalog/SPEC/APT2012LVBC-D.pdf, Description 2="Blue 470nm LED Indication - Discrete 2.65V 0805 (2012 Metric)", Dominant Wavelength=470nm, Height=0.75mm, Lead Free="Lead Free", Length=2mm, Lens Transparency=Clear, Luminous Intensity=24mcd, Mount="Surface Mount", Packaging="Tape and Reel", Pricing 1="1=0.46, 10=0.293, 50=0.293, 100=0.239, 1000=0.174, 10000=0.14 (USD)", Pricing 2="1=0.49, 10=0.313, 50=0.313, 100=0.256, 1000=0.186, 10000=0.15 (USD)", Stock 1=5707, Stock 2=2478, Supplier 1=Mouser, Supplier 2=Mouser, Supplier Part Number 2=604-APT2012LVBCD, Viewing Angle=120°, Width=1.25mm
J1: "USB_Connector_5P_MICRO_USB_FCI", Current Rating="1.8A per Contact", Insulation Color=Black, Manufacturer="Amphenol FCI", Manufacturer Part Number=10118194-0001LF, Material Flammability Rating="UL94 V-0", Operating Temperature="-30°C ~ 80°C", Supplier Part Number 1=609-4618-1-ND, Voltage - Rated=100VAC, Category="Connectors, Interconnects", ComponentLink1Description=http://portal.fciconnect.com/Comergent//fci/drawing/10118194.pdf, ComponentLink1URL=http://portal.fciconnect.com/Comergent//fci/drawing/10118194.pdf, Connector Type="USB - micro B", Contact Finish=Gold, Features="Solder Retention", Gender=Receptacle, Ingress Protection=-, Mating Cycles=10000, Mounting Feature=Horizontal, Mounting Type="Surface Mount, Right Angle; Through Hole", Number of Contacts=5, Number of Ports=1, Packaging="Cut Tape (CT)", Part Status=Active, Pricing 1="1=0.46, 10=0.437, 25=0.3744, 50=0.318, 100=0.3056, 250=0.27444, 500=0.26196 (USD)", RoHS="RoHS Compliant", Shell/Shielding Material="Steel, Stainless", Shielding=Shielded, Specifications="USB 2.0", Stock 1=267893, Supplier 1=Digi-Key, Termination=Solder
J2: library part BAT-HLD-001, "Header, 2 pin, .1 pitch", Manufacturer=Linx, Package Quantity=1000, Supplier Part Number 1=712-BAT-HLD-001, ComponentLink1Description=https://datasheet.ciiva.com/4/bat-hld-001-4035.pdf, ComponentLink1URL=https://datasheet.ciiva.com/4/bat-hld-001-4035.pdf, ComponentLink2Description=https://datasheet.ciiva.com/4642/bat-hld-001-220194-4642567.pdf, ComponentLink2URL=https://datasheet.ciiva.com/4642/bat-hld-001-220194-4642567.pdf, ComponentLink3Description=https://datasheet.ciiva.com/16207/bat-hld-001-16207212.pdf, ComponentLink3URL=https://datasheet.ciiva.com/16207/bat-hld-001-16207212.pdf, Description 1="HOLDER BATTERY 20MM COIN", Lead Free="Lead Free", Manufacturer Part Number=BAT-HLD-001, Mount="Surface Mount,PCB", Number of Cells=1, Packaging=Bulk, Pricing 1="1=0.28, 10=0.28, 50=0.257, 100=0.233, 1000=0.204, 10000=0.183 (USD)", Stock 1=81336, Supplier 1=Mouser, Termination=SMD/SMT
J3: "Wurth CONN MICRO SD CARD PUSH-PUSH R/A", Manufacturer="Wurth Electronics", Max Operating Temperature=85°C, Min Operating Temperature=-25°C, Package Quantity=1, Supplier Part Number 1=732-3819-1-ND, ComponentLink1Description=https://datasheet.ciiva.com/6935/693071010811-6935152.pdf, ComponentLink1URL=https://datasheet.ciiva.com/6935/693071010811-6935152.pdf, ComponentLink2Description=https://datasheet.ciiva.com/25605/0900766b81113f2e-25605369.pdf, ComponentLink2URL=https://datasheet.ciiva.com/25605/0900766b81113f2e-25605369.pdf, ComponentLink3Description=https://datasheet.ciiva.com/6935/693071010811-6935146.pdf, ComponentLink3URL=https://datasheet.ciiva.com/6935/693071010811-6935146.pdf, ComponentLink4Description=https://datasheet.ciiva.com/1104/1759178-1104796.pdf, ComponentLink4URL=https://datasheet.ciiva.com/1104/1759178-1104796.pdf, Connector Type=Connector, Contact Material="Copper,Gold,Copper Alloy", Contact Plating=Gold, Description 1="WURTH ELEKTRONIK         693071010811             CONNECTOR, MICRO SD, SMT, R/A, 8WAY", Height=1.98mm, Lead Free="Lead Free", Length=14mm, Manufacturer Part Number=693071010811, Mount="Surface Mount", Number of Contacts=8, Packaging="Tape and Reel", Pricing 1="1=2.92, 10=2.856, 50=2.513, 100=2.399, 500=2.056 (USD)", REACH SVHC=Unknown, Stock 1=4983, Supplier 1=Digi-Key, Width=15.2mm
R1: library part R-0805(2012), "___ OHM ___ mW 0805(2012) SMD", Case/Package=0805, Manufacturer=Yageo, Manufacturer Part Number=RC0805FR-0771R5L, Power Rating=125mW, Supplier Part Number 1=603-RC0805FR-0771R5L, Tolerance=1%, Voltage Rating (DC)=150V, ComponentLink1Description=http://components.arrow.com/part/dataview/0323_00201025, ComponentLink1URL=http://components.arrow.com/part/dataview/0323_00201025, ComponentLink2Description=http://www.yageo.com.tw/exep/pages/download/literatures/PYu-R_INT-thick_7.pdf, ComponentLink2URL=http://www.yageo.com.tw/exep/pages/download/literatures/PYu-R_INT-thick_7.pdf, Description 1="RES SMD 71.5 OHM 1% 1/8W 0805", Lead Free="Lead Free", Pricing 1="1=0.1, 10=0.015, 50=0.015, 100=0.005, 1000=0.004, 10000=0.003 (USD)", Resistance=71.5R, Stock 1=25750, Supplier 1=Mouser
R2: library part R-0805(2012), "___ OHM ___ mW 0805(2012) SMD", Case/Package=0805, Case Code (Metric)=2012, Manufacturer=Yageo, Manufacturer Part Number=AC0805JR-071KL, Max Operating Temperature=155°C, Max Power Dissipation=125mW, Min Operating Temperature=-55°C, Supplier Part Number 1=603-AC0805JR-071KL, Temperature Coefficient=100ppm/°C, Tolerance=5%, Voltage Rating=150V, Case Code (Imperial)=0805, ComponentLink1Description=http://www.yageo.com/documents/recent/PYu-AC_51_RoHS_L_2_revised.pdf, ComponentLink1URL=http://www.yageo.com/documents/recent/PYu-AC_51_RoHS_L_2_revised.pdf, ComponentLink2Description=http://www.mouser.com/ds/2/447/yageodocoutput-1111992.pdf, ComponentLink2URL=http://www.mouser.com/ds/2/447/yageodocoutput-1111992.pdf, ComponentLink3Description=http://www.yageo.com/NewPortal/yageodocoutput?fileName=/pdf/R-Chip/PYu-AC_51_RoHS_L_6.pdf, ComponentLink3URL=http://www.yageo.com/NewPortal/yageodocoutput?fileName=/pdf/R-Chip/PYu-AC_51_RoHS_L_6.pdf, Composition="Thick Film", Contact Plating=Tin,Matte, Description 1="Thick Film Resistors - SMD 1/8W 1 kOhm 5%", Height=0.024inch, Lead Free="Lead Free", Length=0.079inch, Number of Terminations=2, Packaging="Tape and Reel", Power Rating=125mW, Pricing 1="1=0.1, 10=0.023, 50=0.023, 100=0.008, 1000=0.006, 10000=0.003 (USD)", Radiation Hardening=No, Resistance=1kR, Stock 1=51600, Supplier 1=Mouser, Termination=SMD/SMT, Width=1.25mm
R3: library part R-0805(2012), "___ OHM ___ mW 0805(2012) SMD", Case/Package=0805, Case Code (Metric)=2012, Manufacturer=Yageo, Manufacturer Part Number=RC0805FR-07150RL, Max Operating Temperature=155°C, Max Power Dissipation=125mW, Min Operating Temperature=-55°C, Package Quantity=1, Supplier Part Number 1=603-RC0805FR-07150RL, Temperature Coefficient=100ppm/°C, Tolerance=1%, Voltage Rating=150V, Case Code (Imperial)=0805, ComponentLink1Description=https://datasheet.ciiva.com/11819/0900766b8106beab-11819782.pdf, ComponentLink1URL=https://datasheet.ciiva.com/11819/0900766b8106beab-11819782.pdf, ComponentLink2Description=https://datasheet.ciiva.com/2456/pyu-r-int-thick-7-2456999.pdf, ComponentLink2URL=https://datasheet.ciiva.com/2456/pyu-r-int-thick-7-2456999.pdf, ComponentLink3Description=https://datasheet.ciiva.com/2457/pyu-r-int-thick-7-2457000.pdf, ComponentLink3URL=https://datasheet.ciiva.com/2457/pyu-r-int-thick-7-2457000.pdf, ComponentLink4Description=https://datasheet.ciiva.com/2457/pyu-r-int-thick-7-2457001.pdf, ComponentLink4URL=https://datasheet.ciiva.com/2457/pyu-r-int-thick-7-2457001.pdf, ComponentLink5Description=https://datasheet.ciiva.com/12668/rc0805-12668251.pdf, ComponentLink5URL=https://datasheet.ciiva.com/12668/rc0805-12668251.pdf, ComponentLink6Description=https://datasheet.ciiva.com/7660/38627-7660798.pdf, ComponentLink6URL=https://datasheet.ciiva.com/7660/38627-7660798.pdf, ComponentLink7Description=https://datasheet.ciiva.com/46447/444164-46447566.pdf, ComponentLink7URL=https://datasheet.ciiva.com/46447/444164-46447566.pdf, Composition="Thick Film", Depth=1.25mm, Description 1="RES SMD 150 OHM 1% 1/8W 0805", Height=0.024inch, Lead Free="Lead Free", Length=2mm, Military Standard=Not, Number of Pins=2, Number of Terminations=2, Packaging="Tape and Reel", Power Rating=125mW, Pricing 1="1=0.1, 10=0.016, 50=0.016, 100=0.006, 1000=0.004, 10000=0.003 (USD)", REACH SVHC=Unknown, Resistance=150R, Stock 1=18073, Supplier 1=Mouser, Termination=SMD/SMT, Voltage Rating (DC)=150V, Width=0.049inch
R4 R8 R12 R13 R14 R18 R20: library part R-0805(2012), "___ OHM ___ mW 0805(2012) SMD", Case/Package=0805, Case Code (Metric)=2012, Manufacturer=Yageo, Manufacturer Part Number=AC0805JR-074K7L, Max Operating Temperature=155°C, Max Power Dissipation=125mW, Min Operating Temperature=-55°C, Supplier Part Number 1=603-AC0805JR-074K7L, Temperature Coefficient=100ppm/°C, Tolerance=5%, Voltage Rating=150V, Case Code (Imperial)=0805, ComponentLink1Description=http://www.mouser.com/ds/2/447/yageodocoutput-1111992.pdf, ComponentLink1URL=http://www.mouser.com/ds/2/447/yageodocoutput-1111992.pdf, ComponentLink2Description=http://www.yageo.com/NewPortal/yageodocoutput?fileName=/pdf/R-Chip/PYu-AC_51_RoHS_L_6.pdf, ComponentLink2URL=http://www.yageo.com/NewPortal/yageodocoutput?fileName=/pdf/R-Chip/PYu-AC_51_RoHS_L_6.pdf, ComponentLink3Description=http://www.yageo.com/documents/recent/PYu-AC_51_RoHS_L_2_revised.pdf, ComponentLink3URL=http://www.yageo.com/documents/recent/PYu-AC_51_RoHS_L_2_revised.pdf, Composition="Thick Film", Contact Plating=Tin,Matte, Description 1="Thick Film Resistors - SMD 1/8W 4.7K ohm 5%", Height=0.024inch, Length=0.079inch, Number of Terminations=2, Packaging="Tape and Reel", Power Rating=125mW, Pricing 1="1=0.1, 10=0.023, 50=0.023, 100=0.008, 1000=0.006, 10000=0.003 (USD)", Radiation Hardening=No, Resistance=4.7kR, Supplier 1=Mouser, Termination=SMD/SMT, Width=1.25mm
  R4 R12 R13: Stock 1=79084
  R8 R14 R18 R20: Stock 1=78734
R5 R6: library part R-0805(2012), "___ OHM ___ mW 0805(2012) SMD", Case/Package=0805, Case Code (Metric)=2012, Manufacturer=Yageo, Manufacturer Part Number=RC0805JR-0727RL, Max Operating Temperature=155°C, Max Power Dissipation=125mW, Min Operating Temperature=-55°C, Package Quantity=1, Supplier Part Number 1=603-RC0805JR-0727RL, Temperature Coefficient=100ppm/°C, Tolerance=5%, Voltage Rating=150V, Case Code (Imperial)=0805, ComponentLink1Description=https://datasheet.ciiva.com/2456/pyu-r-int-thick-7-2456049.pdf, ComponentLink1URL=https://datasheet.ciiva.com/2456/pyu-r-int-thick-7-2456049.pdf, ComponentLink2Description=https://datasheet.ciiva.com/2456/pyu-r-int-thick-7-2456050.pdf, ComponentLink2URL=https://datasheet.ciiva.com/2456/pyu-r-int-thick-7-2456050.pdf, ComponentLink3Description=https://datasheet.ciiva.com/2456/pyu-r-int-thick-7-2456051.pdf, ComponentLink3URL=https://datasheet.ciiva.com/2456/pyu-r-int-thick-7-2456051.pdf, ComponentLink4Description=https://datasheet.ciiva.com/17050/rc0805-17050396.pdf, ComponentLink4URL=https://datasheet.ciiva.com/17050/rc0805-17050396.pdf, ComponentLink5Description=https://datasheet.ciiva.com/7941/442941-7941933.pdf, ComponentLink5URL=https://datasheet.ciiva.com/7941/442941-7941933.pdf, ComponentLink6Description=https://datasheet.ciiva.com/7941/442941-7941934.pdf, ComponentLink6URL=https://datasheet.ciiva.com/7941/442941-7941934.pdf, ComponentLink7Description=https://datasheet.ciiva.com/12577/rc0805-12577759.pdf, ComponentLink7URL=https://datasheet.ciiva.com/12577/rc0805-12577759.pdf, Composition="Thick Film", Contact Plating=Tin,Lead,Matte, Depth=1.25mm, Description 1="RES SMD 27 OHM 5% 1/8W 0805", Height=0.024inch, Lead Free="Lead Free", Length=2mm, Military Standard=Not, Number of Terminations=2, Packaging="Tape and Reel", Power Rating=125mW, Pricing 1="1=0.1, 10=0.013, 50=0.013, 100=0.005, 1000=0.003, 10000=0.003 (USD)", Radiation Hardening=No, REACH SVHC=Unknown, Resistance=27R, Stock 1=4359, Supplier 1=Mouser, Termination=SMD/SMT, Weight=0.000194oz, Width=0.049inch
R7 R19 R21 R24: library part R-0805(2012), "___ OHM ___ mW 0805(2012) SMD", Case/Package=0805, Case Code (Metric)=2012, Manufacturer=Yageo, Manufacturer Part Number=RC0805FR-07100KL, Max Operating Temperature=155°C, Max Power Dissipation=125mW, Min Operating Temperature=-55°C, Package Quantity=1, Supplier Part Number 1=603-RC0805FR-07100KL, Temperature Coefficient=100ppm/°C, Tolerance=1%, Voltage Rating=150V, Case Code (Imperial)=0805, ComponentLink1Description=https://datasheet.ciiva.com/2457/pyu-r-int-thick-7-2457017.pdf, ComponentLink1URL=https://datasheet.ciiva.com/2457/pyu-r-int-thick-7-2457017.pdf, ComponentLink2Description=https://datasheet.ciiva.com/12667/rc0805-12667001.pdf, ComponentLink2URL=https://datasheet.ciiva.com/12667/rc0805-12667001.pdf, ComponentLink3Description=https://datasheet.ciiva.com/2457/pyu-r-int-thick-7-2457018.pdf, ComponentLink3URL=https://datasheet.ciiva.com/2457/pyu-r-int-thick-7-2457018.pdf, ComponentLink4Description=https://datasheet.ciiva.com/11808/0900766b8106beab-11808858.pdf, ComponentLink4URL=https://datasheet.ciiva.com/11808/0900766b8106beab-11808858.pdf, ComponentLink5Description=https://datasheet.ciiva.com/16747/rc0805-16747226.pdf, ComponentLink5URL=https://datasheet.ciiva.com/16747/rc0805-16747226.pdf, ComponentLink6Description=https://datasheet.ciiva.com/2457/pyu-r-int-thick-7-2457019.pdf, ComponentLink6URL=https://datasheet.ciiva.com/2457/pyu-r-int-thick-7-2457019.pdf, ComponentLink7Description=https://datasheet.ciiva.com/7660/38627-7660796.pdf, ComponentLink7URL=https://datasheet.ciiva.com/7660/38627-7660796.pdf, ComponentLink8Description=https://datasheet.ciiva.com/7941/1697719-7941676.pdf, ComponentLink8URL=https://datasheet.ciiva.com/7941/1697719-7941676.pdf, ComponentLink9Description=https://datasheet.ciiva.com/7941/1686128-7941677.pdf, ComponentLink9URL=https://datasheet.ciiva.com/7941/1686128-7941677.pdf, ComponentLink10Description=https://datasheet.ciiva.com/7941/1697719-7941678.pdf, ComponentLink10URL=https://datasheet.ciiva.com/7941/1697719-7941678.pdf, ComponentLink11Description=https://datasheet.ciiva.com/22747/444164-22747534.pdf, ComponentLink11URL=https://datasheet.ciiva.com/22747/444164-22747534.pdf, Composition="Thick Film", Depth=1.25mm, Description 1="RES SMD 100K OHM 1% 1/8W 0805", Height=0.024inch, Lead Free="Lead Free", Lead Pitch=0.4mm, Length=2mm, Military Standard=Not, Number of Pins=2, Number of Terminations=2, Packaging="Tape and Reel", Power Rating=125mW, Pricing 1="1=0.1, 10=0.016, 50=0.016, 100=0.006, 1000=0.004, 10000=0.003 (USD)", REACH SVHC=Unknown, Resistance=100kR, Supplier 1=Mouser, Termination=SMD/SMT, Voltage Rating (DC)=150V, Width=0.049inch
  R7 R19 R21: Stock 1=159583
  R24: Stock 1=94214
R9: library part R-0805(2012), "___ OHM ___ mW 0805(2012) SMD", Case/Package=0805, Case Code (Metric)=2012, Manufacturer=Yageo, Manufacturer Part Number=RC0805FR-07442KL, Max Operating Temperature=155°C, Min Operating Temperature=-55°C, Power Rating=125mW, Supplier Part Number 1=603-RC0805FR-07442KL, Temperature Coefficient=100ppm/°C, Tolerance=1%, Voltage Rating=150V, Case Code (Imperial)=0805, ComponentLink1Description=http://www.mouser.com/ds/2/447/Yageo_08112016_RC0805-968729.pdf, ComponentLink1URL=http://www.mouser.com/ds/2/447/Yageo_08112016_RC0805-968729.pdf, ComponentLink2Description=http://components.arrow.com/part/dataview/0323_03537347, ComponentLink2URL=http://components.arrow.com/part/dataview/0323_03537347, ComponentLink3Description=http://www.yageo.com.tw/exep/pages/download/literatures/PYu-R_INT-thick_7.pdf, ComponentLink3URL=http://www.yageo.com.tw/exep/pages/download/literatures/PYu-R_INT-thick_7.pdf, ComponentLink4Description=http://www.yageo.com/documents/recent/PYu-RC0805_51_RoHS_L_5.pdf, ComponentLink4URL=http://www.yageo.com/documents/recent/PYu-RC0805_51_RoHS_L_5.pdf, Composition="Thick Film", Contact Plating=Tin,Matte, Depth=1.25mm, Description 1="Thick Film Resistors - SMD 442K OHM 1%", Height=0.5mm, Lead Free="Lead Free", Length=2mm, Military Standard=Not, Packaging="Tape and Reel", Pricing 1="1=0.1, 10=0.016, 50=0.016, 100=0.006, 1000=0.004, 10000=0.003 (USD)", Radiation Hardening=No, Resistance=442kR, Stock 1=22218, Supplier 1=Mouser, Termination=SMD/SMT, Voltage Rating (DC)=150V, Width=1.25mm
R10: library part R-0805(2012), "___ OHM ___ mW 0805(2012) SMD", Case/Package=0805, Case Code (Metric)=2012, Manufacturer=Yageo, Manufacturer Part Number=RC0805FR-07160KL, Max Operating Temperature=155°C, Max Power Dissipation=125mW, Min Operating Temperature=-55°C, Package Quantity=1, Supplier Part Number 1=603-RC0805FR-07160KL, Temperature Coefficient=100ppm/°C, Tolerance=1%, Voltage Rating=150V, Case Code (Imperial)=0805, ComponentLink1Description=https://datasheet.ciiva.com/11808/0900766b8106beab-11808868.pdf, ComponentLink1URL=https://datasheet.ciiva.com/11808/0900766b8106beab-11808868.pdf, ComponentLink2Description=https://datasheet.ciiva.com/17061/rc0805-17061772.pdf, ComponentLink2URL=https://datasheet.ciiva.com/17061/rc0805-17061772.pdf, ComponentLink3Description=https://datasheet.ciiva.com/2457/pyu-r-int-thick-7-2457005.pdf, ComponentLink3URL=https://datasheet.ciiva.com/2457/pyu-r-int-thick-7-2457005.pdf, ComponentLink4Description=https://datasheet.ciiva.com/2457/pyu-r-int-thick-7-2457006.pdf, ComponentLink4URL=https://datasheet.ciiva.com/2457/pyu-r-int-thick-7-2457006.pdf, ComponentLink5Description=https://datasheet.ciiva.com/2457/pyu-r-int-thick-7-2457007.pdf, ComponentLink5URL=https://datasheet.ciiva.com/2457/pyu-r-int-thick-7-2457007.pdf, Composition="Thick Film", Depth=1.25mm, Description 1="RES SMD 160K OHM 1% 1/8W 0805", Height=0.5mm, Lead Free="Lead Free", Length=2mm, Number of Terminations=2, Packaging="Tape and Reel", Power Rating=125mW, Pricing 1="1=0.1, 10=0.016, 50=0.016, 100=0.006, 1000=0.004, 10000=0.003 (USD)", Resistance=160kR, Stock 1=12686, Supplier 1=Mouser, Termination=SMD/SMT, Voltage Rating (DC)=150V, Width=0.049inch
R11: library part R-0805(2012), "___ OHM ___ mW 0805(2012) SMD", Case/Package=0805, Case Code (Metric)=2012, Manufacturer=Yageo, Manufacturer Part Number=RC0805FR-0725K5L, Max Operating Temperature=155°C, Max Power Dissipation=125mW, Min Operating Temperature=-55°C, Package Quantity=1, Supplier Part Number 1=603-RC0805FR-0725K5L, Temperature Coefficient=100ppm/°C, Tolerance=1%, Voltage Rating=150V, Case Code (Imperial)=0805, ComponentLink1Description=https://datasheet.ciiva.com/2509/pyu-r-int-thick-7-2509489.pdf, ComponentLink1URL=https://datasheet.ciiva.com/2509/pyu-r-int-thick-7-2509489.pdf, ComponentLink2Description=https://datasheet.ciiva.com/2509/pyu-r-int-thick-7-2509490.pdf, ComponentLink2URL=https://datasheet.ciiva.com/2509/pyu-r-int-thick-7-2509490.pdf, ComponentLink3Description=https://datasheet.ciiva.com/2509/pyu-r-int-thick-7-2509491.pdf, ComponentLink3URL=https://datasheet.ciiva.com/2509/pyu-r-int-thick-7-2509491.pdf, ComponentLink4Description=https://datasheet.ciiva.com/5558/rc0805-5558218.pdf, ComponentLink4URL=https://datasheet.ciiva.com/5558/rc0805-5558218.pdf, Composition="Thick Film", Depth=1.25mm, Description 1="RES SMD 25.5K OHM 1% 1/8W 0805", Height=0.024inch, Lead Free="Lead Free", Length=0.079inch, Military Standard=Not, Number of Terminations=2, Packaging="Tape and Reel", Power Rating=125mW, Pricing 1="1=0.1, 10=0.016, 50=0.016, 100=0.006, 1000=0.004, 10000=0.003 (USD)", Resistance=25.5kR, Stock 1=6188, Supplier 1=Mouser, Termination=SMD/SMT, Voltage Rating (DC)=150V, Width=0.049inch
R15 R16: library part R-0805(2012), "___ OHM ___ mW 0805(2012) SMD", Case/Package=0805, Case Code (Metric)=2012, Manufacturer=Yageo, Manufacturer Part Number=RC0805FR-0780R6L, Max Operating Temperature=155°C, Max Power Dissipation=125mW, Min Operating Temperature=-55°C, Package Quantity=1, Supplier Part Number 1=603-RC0805FR-0780R6L, Temperature Coefficient=100ppm/°C, Tolerance=1%, Voltage Rating=150V, Case Code (Imperial)=0805, ComponentLink1Description=https://datasheet.ciiva.com/12560/rc0805-257173-12560565.pdf, ComponentLink1URL=https://datasheet.ciiva.com/12560/rc0805-257173-12560565.pdf, ComponentLink2Description=https://datasheet.ciiva.com/2457/pyu-r-int-thick-7-2457350.pdf, ComponentLink2URL=https://datasheet.ciiva.com/2457/pyu-r-int-thick-7-2457350.pdf, ComponentLink3Description=https://datasheet.ciiva.com/2457/pyu-r-int-thick-7-2457351.pdf, ComponentLink3URL=https://datasheet.ciiva.com/2457/pyu-r-int-thick-7-2457351.pdf, ComponentLink4Description=https://datasheet.ciiva.com/2457/pyu-r-int-thick-7-2457352.pdf, ComponentLink4URL=https://datasheet.ciiva.com/2457/pyu-r-int-thick-7-2457352.pdf, ComponentLink5Description=https://datasheet.ciiva.com/17423/rc0805-17423022.pdf, ComponentLink5URL=https://datasheet.ciiva.com/17423/rc0805-17423022.pdf, Composition="Thick Film", Contact Plating=Tin,Matte, Depth=1.25mm, Description 1="RES SMD 80.6 OHM 1% 1/8W 0805", Height=0.024inch, Lead Free="Lead Free", Length=2mm, Military Standard=Not, Number of Terminations=2, Packaging="Tape and Reel", Power Rating=125mW, Pricing 1="1=0.1, 10=0.016, 50=0.016, 100=0.006, 1000=0.004, 10000=0.003 (USD)", Radiation Hardening=No, Resistance=80.6R, Stock 1=39348, Supplier 1=Mouser, Termination=SMD/SMT, Voltage Rating (DC)=150V, Width=1.25mm
R17: library part R-0805(2012), "___ OHM ___ mW 0805(2012) SMD", Case/Package=0805, Case Code (Metric)=2012, Manufacturer=Yageo, Manufacturer Part Number=AC0805FR-07100RL, Max Operating Temperature=155°C, Max Power Dissipation=125mW, Min Operating Temperature=-55°C, Supplier Part Number 1=603-AC0805FR-07100RL, Temperature Coefficient=100ppm/°C, Tolerance=1%, Voltage Rating=150V, Case Code (Imperial)=0805, ComponentLink1Description=https://datasheet.ciiva.com/12656/pyu-ac-51-rohs-l-2-12656967.pdf, ComponentLink1URL=https://datasheet.ciiva.com/12656/pyu-ac-51-rohs-l-2-12656967.pdf, Composition="Thick Film", Description 1="Thick Film Resistors - SMD 1/8W 100ohm 1%", Height=0.024inch, Length=0.079inch, Number of Terminations=2, Packaging="Tape and Reel", Power Rating=125mW, Pricing 1="1=0.1, 10=0.043, 50=0.043, 100=0.018, 1000=0.007, 10000=0.005 (USD)", Resistance=100R, Stock 1=44735, Supplier 1=Mouser, Termination=SMD/SMT, Width=0.049inch
R22 R23: library part R-0805(2012), "___ OHM ___ mW 0805(2012) SMD", Case/Package=0805, Case Code (Metric)=2012, Manufacturer=Yageo, Manufacturer Part Number=AC0805FR-0710KL, Max Operating Temperature=155°C, Max Power Dissipation=125mW, Min Operating Temperature=-55°C, Package Quantity=1, Supplier Part Number 1=603-AC0805FR-0710KL, Temperature Coefficient=100ppm/°C, Tolerance=1%, Voltage Rating=150V, Case Code (Imperial)=0805, ComponentLink1Description=https://datasheet.ciiva.com/5558/pyu-ac-51-rohs-l-2-5558347.pdf, ComponentLink1URL=https://datasheet.ciiva.com/5558/pyu-ac-51-rohs-l-2-5558347.pdf, Composition="Thick Film", Depth=1.25mm, Description 1="RES SMD 10K OHM 1% 1/8W 0805", Height=0.024inch, Lead Free="Lead Free", Length=0.079inch, Military Standard=Not, Number of Terminations=2, Packaging="Tape and Reel", Power Rating=125mW, Pricing 1="1=0.1, 10=0.043, 50=0.043, 100=0.018, 1000=0.007, 10000=0.005 (USD)", Resistance=10kR, Stock 1=335781, Supplier 1=Mouser, Termination=SMD/SMT, Width=0.049inch